# EAGLE board CT_schematic (EAGLE 7.6.0)

Size 100 x 80 mm. Coordinates in mm from the lower left corner, seen from the top.
Outline: 0,0 100,0 100,80 0,80 0,0
Copper layers (1*16): Top 0.035mm / dielectric 1.5mm / Bottom 0.035mm
Design rules "default": minimum track width 10mil, minimum drill 24mil, track to track 8mil, track to pad 8mil, pad to pad 8mil, via to via 8mil, smd to smd 8mil, copper to edge 40mil, drill to drill 8mil, minimum pad ring 10mil, minimum via ring 8mil, stop-mask expansion 4mil, vias tented up to drill 0mil, thermal gap 10mil

## Footprints (pad centres in the part's own frame; a part is rotated, then mirrored left to right if it is on the bottom)
C0603 = smd 0.8 x 0.8: 1 -0.762,0; 2 0.762,0
C0402 = smd 0.5 x 0.5: 1 -0.508,0; 2 0.508,0
C1206 = smd 1.3 x 1.6: 1 -1.524,0; 2 1.524,0
C1210 = smd 1.2 x 2.5: 1 -1.524,0; 2 1.524,0
EXV-9H = smd 3.505 x 1.676: 1 -2.857,0; 2 2.857,0
L0603 = smd 0.8 x 0.8: 1 -0.762,0; 2 0.762,0
L1210 = smd 1.2 x 2.5: 1 -1.524,0; 2 1.524,0
PJ-037B_PACKAGE = drill 3.7 square: 1 12,0 | drill 3.2 square: 2 6,0
R0603 = smd 0.8 x 0.8: 1 -0.762,0; 2 0.762,0
LQFP100 = smd 0.3 x 1.2: 1 -6,-7.75; 2 -5.5,-7.75; 3 -5,-7.75; 4 -4.5,-7.75; 5 -4,-7.75; 6 -3.5,-7.75; 7 -3,-7.75; 8 -2.5,-7.75; 9 -2,-7.75; 10 -1.5,-7.75; 11 -1,-7.75; 12 -0.5,-7.75; 13 0,-7.75; 14 0.5,-7.75; 15 1,-7.75; 16 1.5,-7.75; 17 2,-7.75; 18 2.5,-7.75; 19 3,-7.75; 20 3.5,-7.75; 21 4,-7.75; 22 4.5,-7.75; 23 5,-7.75; 24 5.5,-7.75; 25 6,-7.75; 51 6,7.75; 52 5.5,7.75; 53 5,7.75; 54 4.5,7.75; 55 4,7.75; 56 3.5,7.75; 57 3,7.75; 58 2.5,7.75; 59 2,7.75; 60 1.5,7.75; 61 1,7.75; 62 0.5,7.75; 63 0,7.75; 64 -0.5,7.75; 65 -1,7.75; 66 -1.5,7.75; 67 -2,7.75; 68 -2.5,7.75; 69 -3,7.75; 70 -3.5,7.75; 71 -4,7.75; 72 -4.5,7.75; 73 -5,7.75; 74 -5.5,7.75; 75 -6,7.75 | smd 1.2 x 0.3: 26 7.75,-6; 27 7.75,-5.5; 28 7.75,-5; 29 7.75,-4.5; 30 7.75,-4; 31 7.75,-3.5; 32 7.75,-3; 33 7.75,-2.5; 34 7.75,-2; 35 7.75,-1.5; 36 7.75,-1; 37 7.75,-0.5; 38 7.75,0; 39 7.75,0.5; 40 7.75,1; 41 7.75,1.5; 42 7.75,2; 43 7.75,2.5; 44 7.75,3; 45 7.75,3.5; 46 7.75,4; 47 7.75,4.5; 48 7.75,5; 49 7.75,5.5; 50 7.75,6; 76 -7.75,6; 77 -7.75,5.5; 78 -7.75,5; 79 -7.75,4.5; 80 -7.75,4; 81 -7.75,3.5; 82 -7.75,3; 83 -7.75,2.5; 84 -7.75,2; 85 -7.75,1.5; 86 -7.75,1; 87 -7.75,0.5; 88 -7.75,0; 89 -7.75,-0.5; 90 -7.75,-1; 91 -7.75,-1.5; 92 -7.75,-2; 93 -7.75,-2.5; 94 -7.75,-3; 95 -7.75,-3.5; 96 -7.75,-4; 97 -7.75,-4.5; 98 -7.75,-5; 99 -7.75,-5.5; 100 -7.75,-6
SSOP-16 = smd 1.981 x 0.356: 1 -2.464,2.223; 2 -2.464,1.587; 3 -2.464,0.953; 4 -2.464,0.318; 5 -2.464,-0.318; 6 -2.464,-0.953; 7 -2.464,-1.587; 8 -2.464,-2.223; 9 2.464,-2.223; 10 2.464,-1.587; 11 2.464,-0.953; 12 2.464,-0.318; 13 2.464,0.318; 14 2.464,0.953; 15 2.464,1.587; 16 2.464,2.223
182-009-MALE = drill 1.194 pad 1.524 octagon: 1 -5.537,10.923; 2 -2.769,10.923; 3 0,10.923; 4 2.769,10.923; 5 5.537,10.923; 6 -4.153,8.08; 7 -1.384,8.08; 8 1.384,8.08; 9 4.153,8.08 | hole 3.048: -12.446,9.501; 12.446,9.501
MBH7BLZ02-109004 = smd 0.5 x 0.5: 1 0,0; 15 9.85,0; 27 9.85,8.45; 41 0,8.45 | smd 0.45 x 0.5: 2 0.725,0; 3 1.425,0; 4 2.125,0; 5 2.825,0; 6 3.525,0; 7 4.225,0; 8 4.925,0; 9 5.625,0; 10 6.325,0; 11 7.025,0; 12 7.725,0; 13 8.425,0; 14 9.125,0 | smd 0.5 x 0.45: 16 9.85,0.725; 17 9.85,1.425; 18 9.85,2.125; 19 9.85,2.825; 20 9.85,3.525; 21 9.85,4.225; 22 9.85,4.925; 23 9.85,5.625; 24 9.85,6.325; 25 9.85,7.025; 26 9.85,7.725; 28 9.15,8.45; 29 8.45,8.45; 30 7.75,8.45; 31 7.05,8.45; 32 6.35,8.45; 33 5.65,8.45; 34 4.95,8.45; 35 4.25,8.45; 36 3.55,8.45; 37 2.85,8.45; 38 2.15,8.45; 39 1.45,8.45; 40 0.75,8.45; 42 0,7.75; 43 0,7.05; 44 0,6.35; 45 0,5.65; 46 0,4.95; 47 0,4.25; 48 0,3.55; 49 0,2.85; 50 0,2.15; 51 0,1.45; 52 0,0.75 | smd 3 x 2.5: 53 3.225,2.775; 54 6.625,2.775; 55 6.625,5.675; 56 3.225,5.675
ASEK = smd 1.4 x 1: 1 -1.1,-0.8; 2 1.1,-0.8; 3 1.1,0.8; 4 -1.1,0.8
ASFL1 = smd 1.7 x 1.5: 1 -1.27,-1.1; 2 1.27,-1.1; 3 1.27,1.1; 4 -1.27,1.1
WSON-8 = smd 0.3 x 0.6: 1 -0.75,0; 2 0.05,0; 3 0.85,0; 4 1.65,0; 5 1.65,3.8; 6 0.85,3.8; 7 0.05,3.8; 8 -0.75,3.8 | smd 3 x 2.6: PAD 0.45,1.9
SON-6 = smd 0.55 x 0.3: 1 -0.355,0.5 | smd 0.52 x 0.3: 2 -0.37,0; 3 -0.37,-0.5; 4 0.37,-0.5; 5 0.37,0; 6 0.37,0.5
SW_4-1437565-2 = smd 1.4 x 2.1: 1 -2.23,4.55; 2 -2.23,-4.55; 3 2.23,4.55; 4 2.23,-4.55
LGM67K-G1J2-24-Z = smd 0.8 x 1.4: A -2,0; C 0,0
NC7SZ125M5X = smd 1.3 x 0.7: 1 -1.3,0.95; 2 -1.3,0; 3 -1.3,-0.95; 4 1.3,-0.95; 5 1.3,0.95

## Placement (x,y rotation side)
C1  1e-07  [C0603]  -22.86,64.77 0 top  (outside the outline)
C2  1e-07  [C0603]  -26.67,64.77 0 top  (outside the outline)
C3  1e-07  [C0603]  -30.48,64.77 0 top  (outside the outline)
C4  1e-07  [C0603]  -34.29,64.77 0 top  (outside the outline)
C5  1e-07  [C0603]  -38.1,64.77 0 top  (outside the outline)
C6  4.7e-06  [C0603]  -15.24,64.77 0 top  (outside the outline)
C7  1e-07  [C0603]  -41.91,64.77 0 top  (outside the outline)
C8  1e-08  [C0603]  -45.72,64.77 0 top  (outside the outline)
C9  1e-06  [C0603]  -49.53,64.77 0 top  (outside the outline)
C10  1e-06  [C0603]  -53.34,64.77 0 top  (outside the outline)
C11  1e-06  [C0603]  -57.15,64.77 0 top  (outside the outline)
C12  2.2e-07  [C0603]  -19.05,64.77 0 top  (outside the outline)
C13  1e-06  [C0603]  -60.96,64.77 0 top  (outside the outline)
C14  1e-06  [C0603]  -64.77,64.77 0 top  (outside the outline)
C15  1e-07  [C0402]  -34.29,69.85 0 top  (outside the outline)
C16  1e-07  [C0402]  -38.1,69.85 0 top  (outside the outline)
C17  1e-08  [C0402]  -41.91,69.85 0 top  (outside the outline)
C18  1e-08  [C0402]  -45.72,69.85 0 top  (outside the outline)
C19  1e-08  [C0402]  -49.53,69.85 0 top  (outside the outline)
C20  1e-05  [C1206]  -22.86,58.42 0 top  (outside the outline)
C21  1e-05  [C1210]  -71.12,50.8 0 top  (outside the outline)
C22  1e-07  [C0402]  -53.34,69.85 0 top  (outside the outline)
C23  0.0001  [EXV-9H]  -38.1,52.07 0 top  (outside the outline)
C24  0.0001  [EXV-9H]  -49.53,52.07 0 top  (outside the outline)
C25  1e-08  [C0402]  -57.15,69.85 0 top  (outside the outline)
C26  1e-08  [C0402]  -60.96,69.85 0 top  (outside the outline)
F1  240.0  [L0603]  -68.58,64.77 0 top  (outside the outline)
I1  1e-05  [L1210]  -16.51,59.69 0 top  (outside the outline)
J1  PJ-037B  [PJ-037B_PACKAGE]  -27.94,29.21 0 top  (outside the outline)
R2  1000.0  [R0603]  -72.39,64.77 0 top  (outside the outline)
R4  4700.0  [R0603]  -15.24,69.85 0 top  (outside the outline)
R5  4700.0  [R0603]  -19.05,69.85 0 top  (outside the outline)
R6  10000.0  [R0603]  -60.96,58.42 0 top  (outside the outline)
R7  100000.0  [R0603]  -40.64,58.42 0 top  (outside the outline)
R8  100000.0  [R0603]  -45.72,58.42 0 top  (outside the outline)
R9  2231.0  [R0603]  -22.86,69.85 0 top  (outside the outline)
R10  1000.0  [R0603]  -26.67,69.85 0 top  (outside the outline)
R11  10000.0  [R0603]  -66.04,58.42 0 top  (outside the outline)
R12  10000.0  [R0603]  -71.12,58.42 0 top  (outside the outline)
R13  9100.0  [R0603]  -30.48,69.85 0 top  (outside the outline)
R14  680000.0  [R0603]  -50.8,58.42 0 top  (outside the outline)
R15  120000.0  [R0603]  -55.88,58.42 0 top  (outside the outline)
U1  STM32L151V8T6  [LQFP100]  -63.5,8.89 0 top  (outside the outline)
U2  LTC2804CGN-1#PBF  [SSOP-16]  -29.21,41.91 0 top  (outside the outline)
U3  182-009-113R531  [182-009-MALE]  -36.83,6.35 0 top  (outside the outline)
U4  MBH7BLZ02-109004  [MBH7BLZ02-109004]  -52.07,24.13 0 top  (outside the outline)
U5  ASEK-32.768KHz-ECST  [ASEK]  -29.21,52.07 0 top  (outside the outline)
U6  ASFL1-25MHZ-NCS  [ASFL1]  -67.31,40.64 0 top  (outside the outline)
U7  LP3878SDX-ADJ/NOPB  [WSON-8]  -50.8,39.37 0 top  (outside the outline)
U8  TPS3895ADRYR  [SON-6]  -63.5,68.58 0 top  (outside the outline)
U9  4-1437565-2  [SW_4-1437565-2]  -68.58,27.94 0 top  (outside the outline)
U10  Q65110A2395  [LGM67K-G1J2-24-Z]  -59.69,50.8 0 top  (outside the outline)
U11  nc7sz125m5x  [NC7SZ125M5X]  -27.94,58.42 0 top  (outside the outline)
U12  nc7sz125m5x  [NC7SZ125M5X]  -34.29,58.42 0 top  (outside the outline)

## Library data of the parts
C1-C26 F1 I1 J1 R2 R4-R15 U1-U12 = circuit_tree

## Nets
CLK_U1_8: U1.8 U5.3
CLK_U1_12: U1.12 U6.3
GND: C1.2 C2.2 C3.2 C4.2 C5.2 C6.2 C7.2 C8.2 C9.2 C10.2 C11.2 C13.2 C14.2 C15.2 C16.2 C17.2 C18.2 C19.2 C20.2 C21.2 C22.2 C23.2 C24.2 C25.2 C26.2 J1.2 R2.2 R6.2 R10.2 R13.2 R15.2 U1.10 U1.19 U1.20 U1.27 U1.49 U1.74 U1.99 U2.8 U3.5 U4.1 U4.3 U4.15 U4.27 U4.29 U4.41 U4.42 U4.43 U4.44 U4.45 U4.46 U4.47 U4.48 U4.49 U4.50 U4.52 U4.53 U4.54 U4.55 U4.56 U5.2 U6.2 U7.3 U7.PAD U8.2 U10.C U11.1 U11.3 U12.1 U12.3
NET_U1_6: C7.1 U1.6
NET_U1_14: R5.1 U1.14 U12.4
NET_U1_22: C8.1 C9.1 F1.1 U1.21 U1.22
NET_U1_94: R6.1 U1.94
NET_U1_97: U10.A
NET_U1_98: U9.3 U9.4
NET_U2_6: C10.1 U2.6
NET_U2_7: C12.1 I1.2 U2.7
NET_U2_9: C11.1 U2.9
NET_U2_10: C12.2 U2.10
NET_U2_11: R7.1 U2.11
NET_U3_2: U2.1 U3.2
NET_U3_3: U2.3 U3.3
NET_U3_7: U2.2 U3.7
NET_U3_8: U2.4 U3.8
NET_U4_39: R4.1 U4.39 U11.4
NET_U7_1: C19.1 U7.1
NET_U7_6: R9.2 R10.1 U7.6
NET_U7_8: R8.1 U7.8
NET_U8_1: R12.1 R13.1 U8.1
NET_U8_3: R14.2 R15.1 U8.3
NET_U8_4: R11.1 U8.4 U11.2 U12.2
NET_U9_1: R2.1 U9.1 U9.2
PROC_USART1_CTS: U1.70 U4.26
PROC_USART1_RTS: U1.71 U4.24
PROC_USART1_RX: U1.69 U4.25
PROC_USART1_TX: U1.68 U4.23
PROC_USART2_CTS: U2.13
PROC_USART2_RTS: U2.15
PROC_USART2_RX: U2.16
PROC_USART2_TX: U2.14
VCC_S1_9V4: C20.1 C23.1 C24.1 J1.1 R8.2 U7.4
VCC_TIER1_3V3: C1.1 C2.1 C3.1 C4.1 C5.1 C6.1 C13.1 C14.1 C15.1 C16.1 C17.1 C18.1 C21.1 C22.1 C25.1 C26.1 F1.2 I1.1 R4.2 R5.2 R7.2 R9.1 R11.2 R12.2 R14.1 U1.11 U1.28 U1.50 U1.75 U1.100 U2.5 U2.12 U4.28 U5.4 U6.4 U7.5 U8.6 U11.5 U12.5

## Tracks (layer width: path | path; a pad name or v marks a point on that pad's centre or on a via)
CLK_U1_8  (1 unrouted)
CLK_U1_12  (1 unrouted)
GND  (69 unrouted)
NET_U1_6  (1 unrouted)
NET_U1_14  (2 unrouted)
NET_U1_22  (4 unrouted)
NET_U1_94  (1 unrouted)
NET_U1_98  (1 unrouted)
NET_U2_6  (1 unrouted)
NET_U2_7  (2 unrouted)
NET_U2_9  (1 unrouted)
NET_U2_10  (1 unrouted)
NET_U2_11  (1 unrouted)
NET_U3_2  (1 unrouted)
NET_U3_3  (1 unrouted)
NET_U3_7  (1 unrouted)
NET_U3_8  (1 unrouted)
NET_U4_39  (2 unrouted)
NET_U7_1  (1 unrouted)
NET_U7_6  (2 unrouted)
NET_U7_8  (1 unrouted)
NET_U8_1  (2 unrouted)
NET_U8_3  (2 unrouted)
NET_U8_4  (3 unrouted)
NET_U9_1  (2 unrouted)
PROC_USART1_CTS  (1 unrouted)
PROC_USART1_RTS  (1 unrouted)
PROC_USART1_RX  (1 unrouted)
PROC_USART1_TX  (1 unrouted)
VCC_S1_9V4  (5 unrouted)
VCC_TIER1_3V3  (38 unrouted)